# Altium PCB pcdembedded1.PcbDoc
Units mil, origin at the board's own origin, x right, y up, seen from the top; angles counter-clockwise.
Board outline 3915 x 3695 mil, 2 copper layers (Top Layer, Bottom Layer); 28 components, 24 nets, 87 pads, 3 vias.
Unrouted connection lines stored in the file: 3.
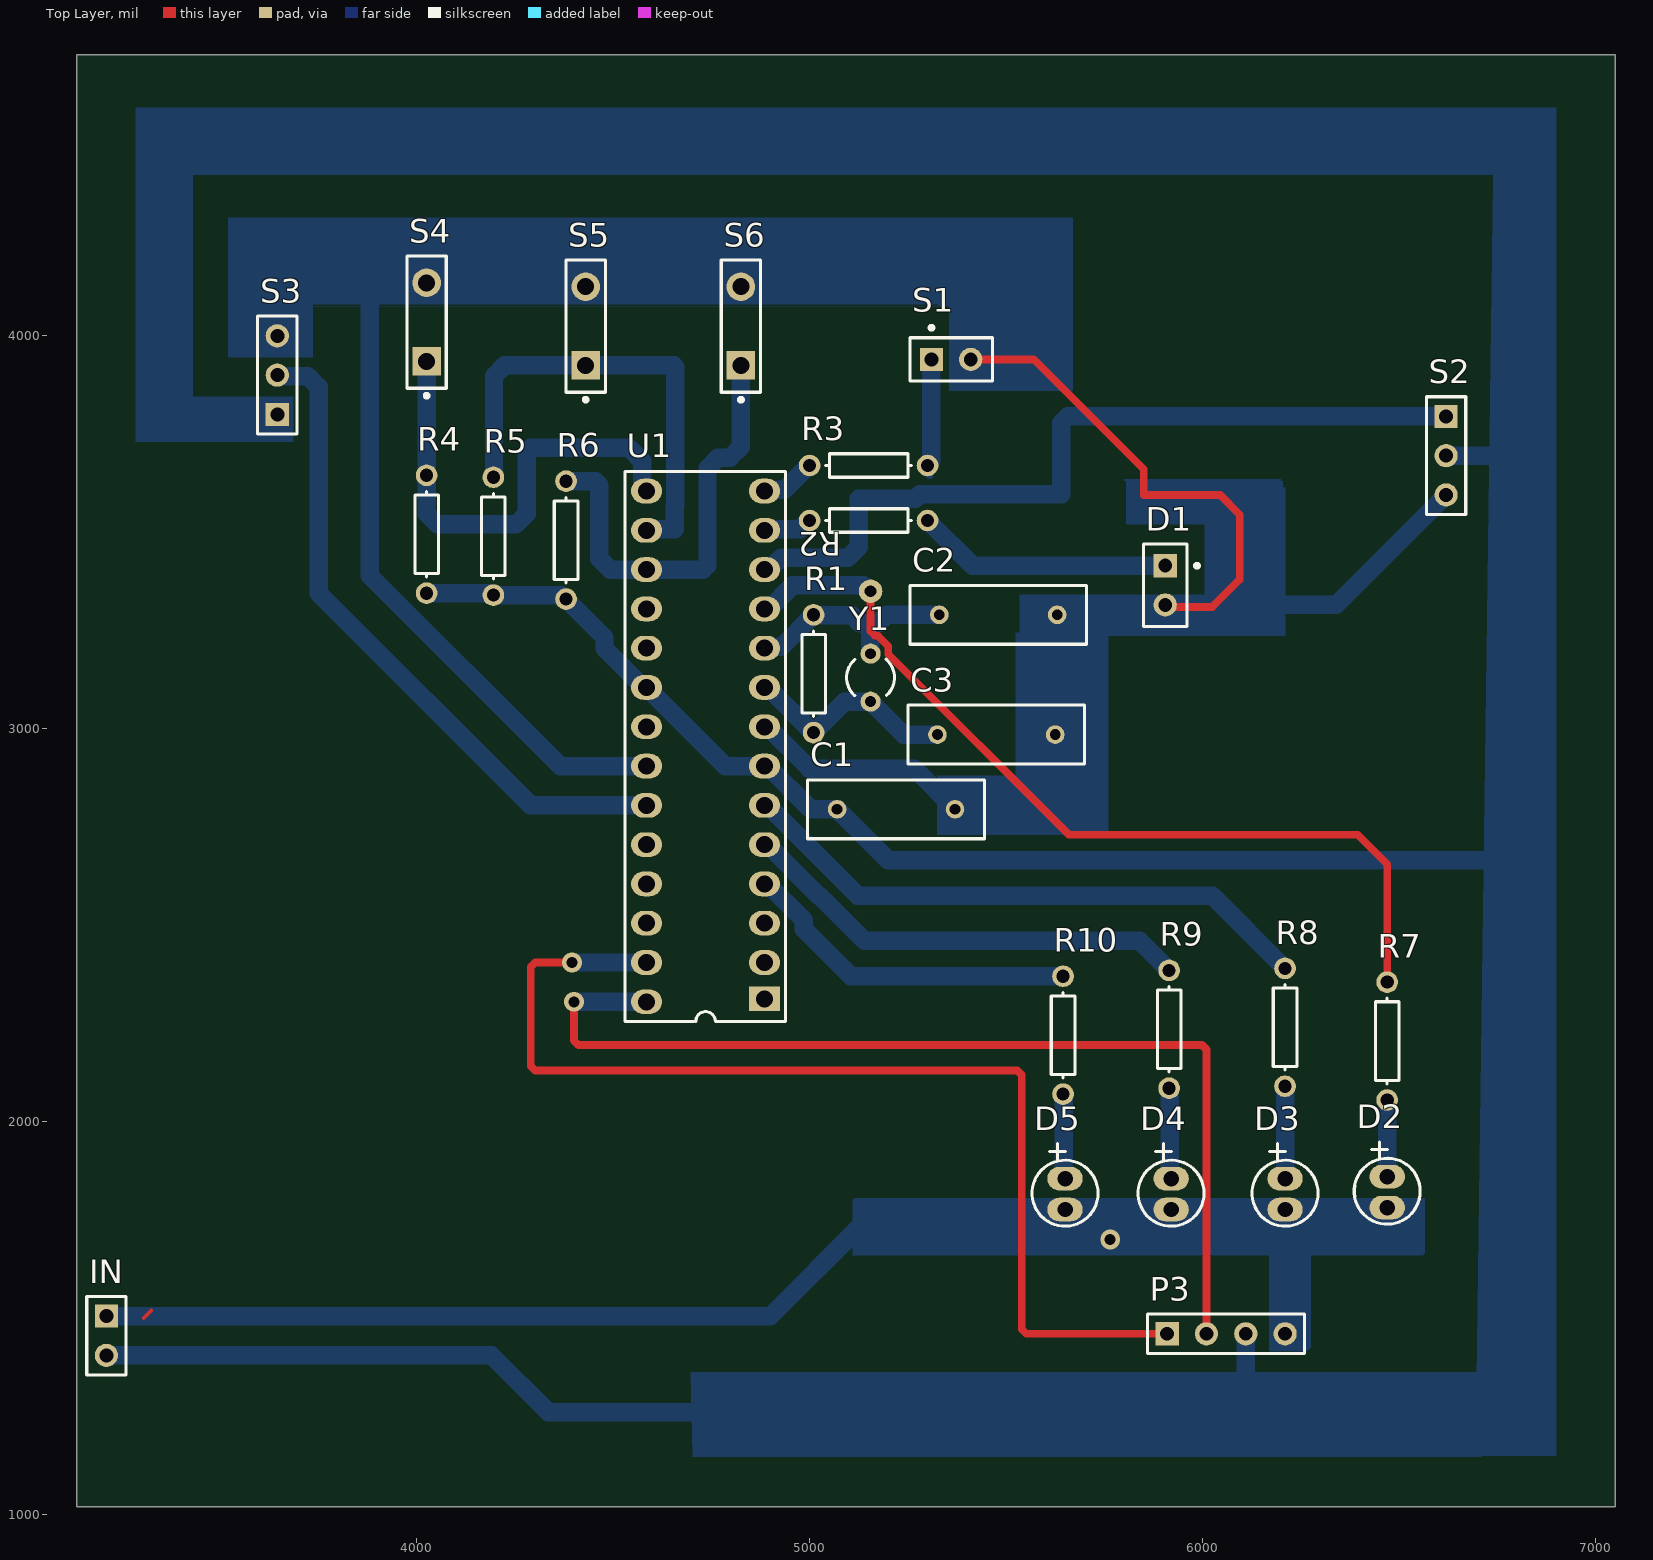
[diagram p0: Top Layer view]
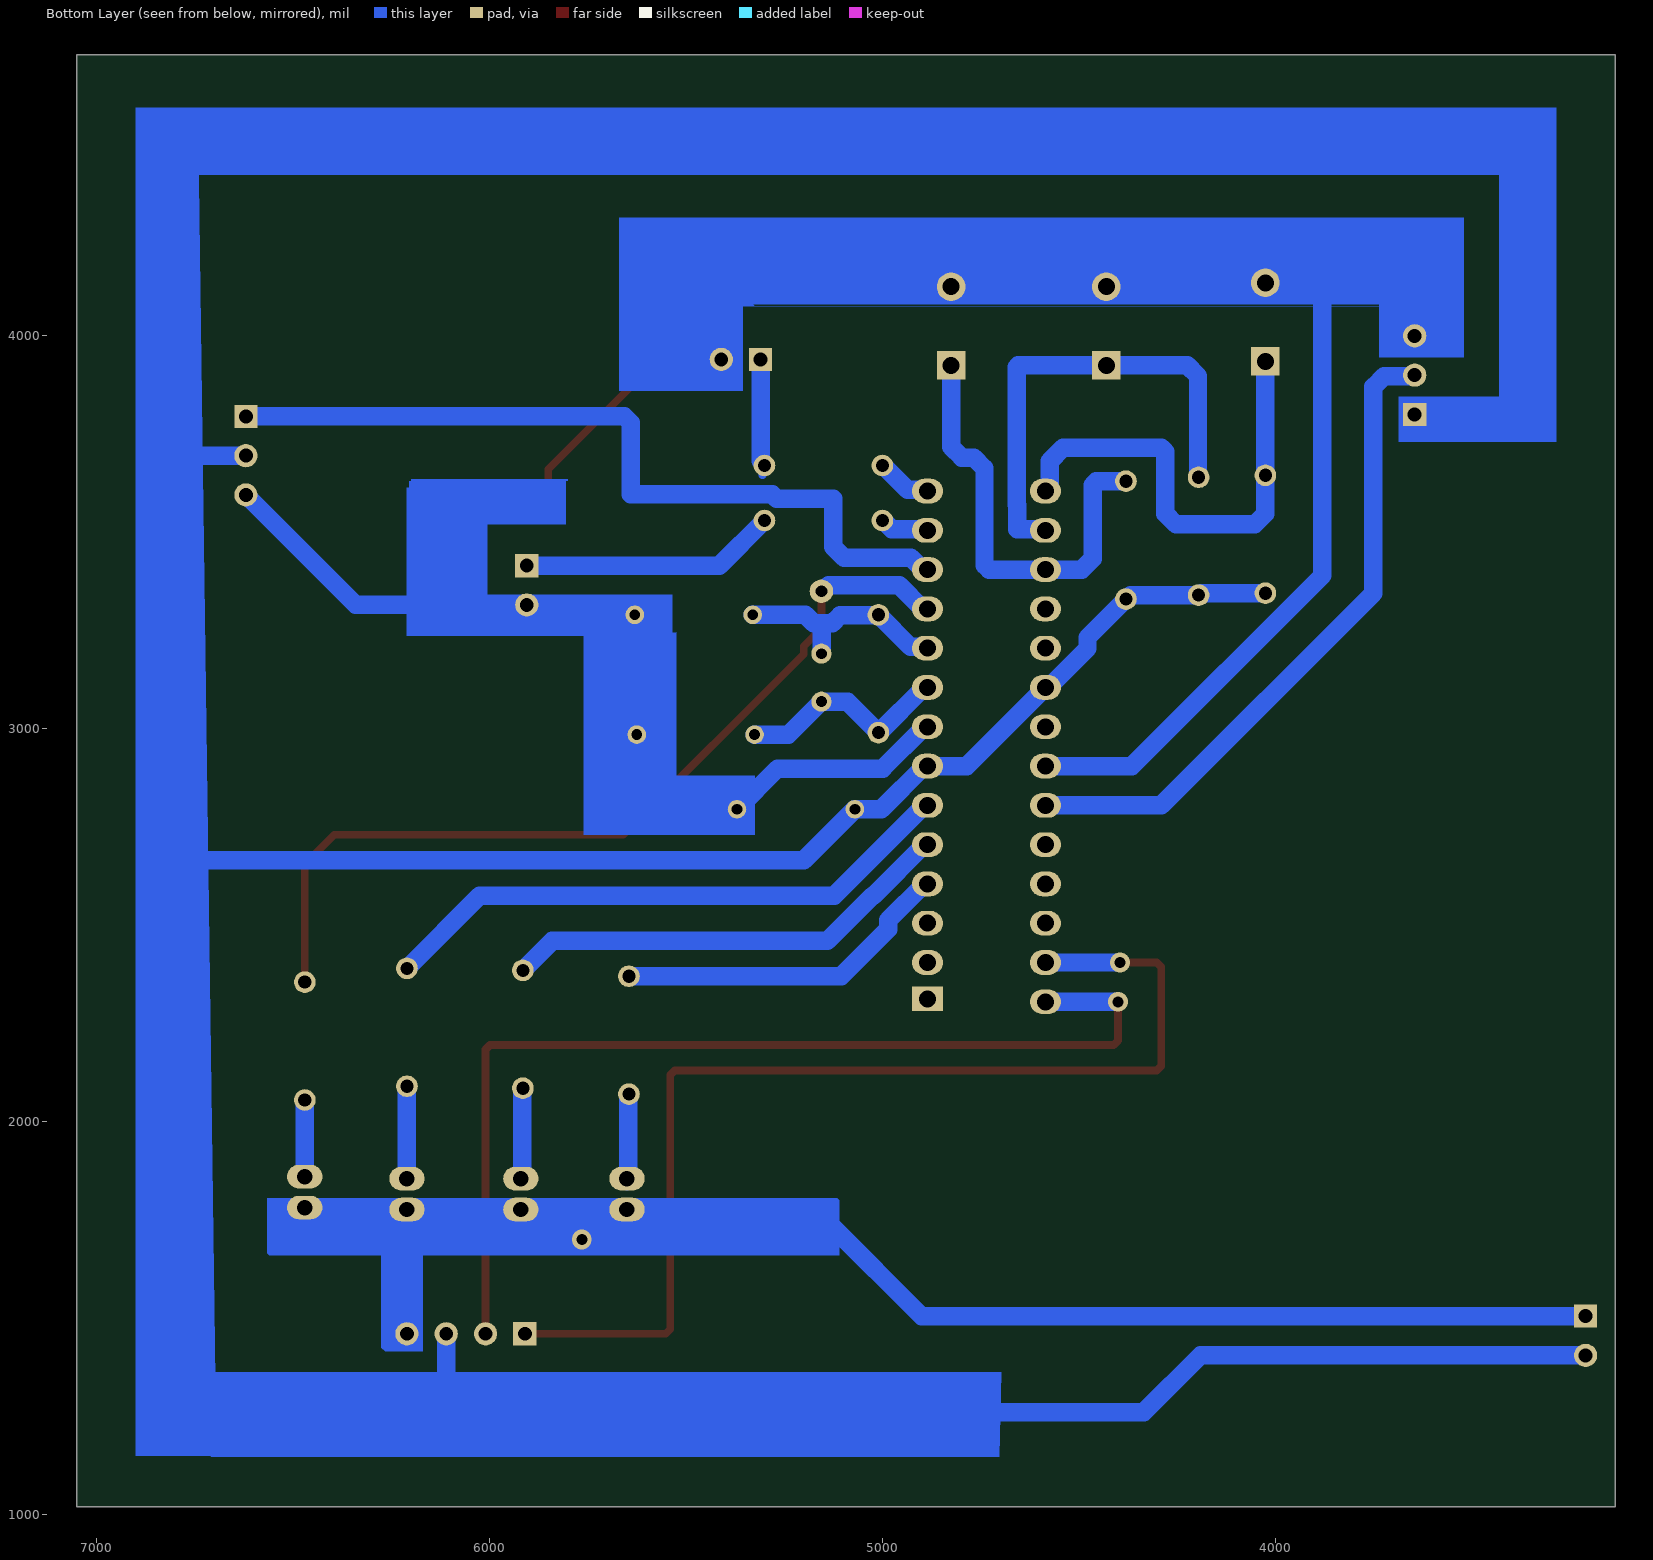
[diagram p1: Bottom Layer view, seen from below]

## Layer stack, top to bottom
Top Solder: solder mask 0.4, Solder Resist, Dk 3.5
Top Layer: signal copper 1.4
Dielectric 1: dielectric 12.6, FR-4, Dk 4.8
Bottom Layer: signal copper 1.4
Bottom Solder: solder mask 0.4, Solder Resist, Dk 3.5

## Board outline
3135,1020 7050,1020 7050,4715 3135,4715

## Design rules (kind name [scope] priority, off if disabled: settings)
Clearance [All] p1: gap=10 ignorepadtopadclearanceinfootprint=FALSE
PolygonConnect [All] p1: connectstyle=Relief reliefconductorwidth=10 reliefentries=4 polygonreliefangle="90 Angle" airgapwidth=10
RoutingVias [All] p1: holewidth=28 width=35 viastyle="Through Hole" minholewidth=28 minwidth=35 maxholewidth=28 maxwidth=35
SolderMaskExpansion [All] p1: expansion=4 istentingtop=FALSE
Width [All] p1: maxlimit=47 minlimit=19.6 preferedwidth=25
30 further rules are at their usual default settings.

## Components (designator, comment, footprint, x,y, rotation, side; value= is the part's Value field where it differs from the comment)
C1 "Cap" RAD-0.3 5220,2795 r180 top value=100pF
C2 "Cap" RAD-0.3 5480,3290 r0 top value=100pF
C3 "Cap" RAD-0.3 5475,2985 r0 top value=100pF
D1 "Bulb" PIN2 5905,3415 r270 top
D2 "LED" CAP10UF 6470,1781.26 r90 top
D3 "LED" CAP10UF 6210,1776.26 r90 top
D4 "LED" CAP10UF 5920,1776.26 r90 top
D5 "LED" CAP10UF 5650,1776.26 r90 top
IN "Header 2" HDR1X2 3210,1505 r270 top
P3 "Header 4" HDR1X4 5910,1460 r0 top
R1 "Res1" AXIAL-0.3 5010,3140 r90 top value=1M
R2 "Res1" AXIAL-0.3 5150,3530 r0 top value=1K
R3 "Res1" AXIAL-0.3 5150,3670 r0 top value=10K
R4 "Res1" AXIAL-0.3 4025,3495 r270 top value=10K
R5 "Res1" AXIAL-0.3 4195,3490 r270 top value=10K
R6 "Res1" AXIAL-0.3 4380,3480 r270 top value=10K
R7 "Res1" AXIAL-0.3 6470,2205 r270 top value=1K
R8 "Res1" AXIAL-0.3 6210,2240 r270 top value=1K
R9 "Res1" AXIAL-0.3 5915,2235 r270 top value=1K
R10 "Res1" AXIAL-0.3 5645,2220 r270 top value=1K
S1 "buzzer" PIN2 5310,3940 r0 top
S2 "servo" HDR1X3 6620,3795 r270 top
S3 "DHT11" HDR1X3 3645,3800 r90 top
S4 "SW-PB" SPST-2 4025,4035 r90 top
S5 "SW-PB" SPST-2 4430,4025 r90 top
S6 "SW-PB" SPST-2 4825,4025 r90 top
U1 "ATMEGA328P-PU" 27_DIP_7.62mm 4885.39,2312.48 r180 top
Y1 "XTAL" R38 5155,3130 r180 top

## Footprints (in the part's own frame and the unit in brackets; to place one, negate y for a bottom-side part, rotate by r counter-clockwise, add the part's x,y. Pads: shape width x height; smd on the part's side, far side on the other; paste and mask are expansions set on the pad)
27_DIP_7.62mm [mm]
  rect 2x1.6 hole 1.1: 1(0,0)
  oval 2x1.6 hole 1.1: 2(0.01,-2.35) 3(0.01,-4.89) 4(0.01,-7.43) 5(0.01,-9.97) 6(0.01,-12.51) 7(0.01,-15.05) 8(0.01,-17.59) 9(0.01,-20.13) 10(0.01,-22.67) 11(0.01,-25.21) 12(0.01,-27.75) 13(0.01,-30.29) 14(0.01,-32.83) 15(7.63,-32.83) 16(7.63,-30.29) 17(7.63,-27.75) 18(7.63,-25.21) 19(7.63,-22.67) 20(7.63,-20.13) 21(7.63,-17.59) 22(7.63,-15.05) 23(7.63,-12.51) 24(7.63,-9.97) 25(7.63,-7.43) 26(7.63,-4.89) 27(7.63,-2.35) 28(7.63,0.19)
  silkscreen extent -1.35,-34.1 9.02,1.46, body extent -0.23,-34.26 7.65,1.68, height 4.65
AXIAL-0.3 [mm] "Axial Device, Thru-Hole; 2 Leads; 0.3 in Pin Spacing"
  round 1.4 hole 0.85: 1(-3.81,0) 2(3.81,0)
  silkscreen extent -2.77,-0.76 2.77,0.76
CAP10UF [mil]
  oval 60x90 hole 39.37 unplated: 1(78.74,0) 2(0,0)
  silkscreen extent -42,-84 167,84
HDR1X2 [mm] "Connector; Header; 2 Position"
  rect 1.5x1.5 hole 0.9: 1(0,0)
  round 1.5 hole 0.9: 2(2.54,0)
  silkscreen extent -1.27,-1.27 3.81,1.27
HDR1X3 [mm] "Connector; Header; 3 Position"
  rect 1.5x1.5 hole 0.9: 1(0,0)
  round 1.5 hole 0.9: 2(2.54,0) 3(5.08,0)
  silkscreen extent -1.27,-1.27 6.35,1.27
HDR1X4 [mm] "Connector; Header; 4 Position"
  rect 1.5x1.5 hole 0.9: 1(0,0)
  round 1.5 hole 0.9: 2(2.54,0) 3(5.08,0) 4(7.62,0)
  silkscreen extent -1.27,-1.27 8.89,1.27
PIN2 [mm] "Photosensitive Diode; 2 Leads"
  rect 1.5x1.5 hole 0.9: 1(0,0)
  round 1.5 hole 0.9: 2(2.54,0)
  silkscreen extent -1.4,-1.4 3.94,2.18
R38 [mm] "Crystal, Thru-Hole; 2 Leads; Body 3.1 x 8.2 mm (Dia.xH)"
  round 1.3 hole 0.7: 1(0,1.55) 2(0,-1.55)
  silkscreen extent -1.55,-1.19 1.55,1.17
RAD-0.3 [mm] "Radial Cap, Thru-Hole; 2 Leads; 0.3 in Pin Spacing"
  round 1.2 hole 0.7: 1(-3.81,0) 2(3.81,0)
  silkscreen extent -5.71,-1.91 5.71,1.91
SPST-2 [mm] "Switch; 2 Leads"
  rect 1.85x1.85 hole 1.1: 1(-2.54,0)
  round 1.85 hole 1.1: 2(2.54,0)
  silkscreen extent -4.89,-1.27 4.28,1.27

## Part data
C1 C2 C3: "Capacitor", LatestRevisionDate=17-Jul-2002, LatestRevisionNote="Re-released for DXP Platform.", PackageDescription="Radial Cap, Thru-Hole; 2 Leads; 0.3 in Pin Spacing", PackageReference=RAD-0.3, Published=8-Jun-2000, Publisher="Altium Limited"
D1: library part Lamp, "Incandescent Bulb", LatestRevisionDate=17-Jul-2002, LatestRevisionNote="Re-released for DXP Platform.", PackageReference=PIN2, Published=24-Mar-1999, Publisher="Altium Limited"
IN: "Header, 2-Pin", LatestRevisionDate=17-Jul-2002, LatestRevisionNote="Re-released for DXP Platform.", Publisher="Altium Limited"
P3: "Header, 4-Pin", LatestRevisionDate=17-Jul-2002, LatestRevisionNote="Re-released for DXP Platform.", Publisher="Altium Limited"
R1 R2 R3 R4 R5 R6 R7 R8 R9 R10: "Resistor", LatestRevisionDate=17-Jul-2002, LatestRevisionNote="Re-released for DXP Platform.", PackageDescription="Axial Device, Thru-Hole; 2 Leads; 0.3 in Pin Spacing", PackageReference=AXIAL-0.3, Published=8-Jun-2000, Publisher="Altium Limited"
S1: library part Speaker, "Loudspeaker", LatestRevisionDate=17-Jul-2002, LatestRevisionNote="Re-released for DXP Platform.", PackageReference=PIN2, Published=24-Mar-1999, Publisher="Altium Limited"
S2 S3: library part "Header 3", "Header, 3-Pin", LatestRevisionDate=17-Jul-2002, LatestRevisionNote="Re-released for DXP Platform.", Publisher="Altium Limited"
S4 S5 S6: "Switch", LatestRevisionDate=17-Jul-2002, LatestRevisionNote="Re-released for DXP Platform.", PackageDescription="Switch; 2 Leads", PackageReference=SPST-2, Published=24-Mar-1999, Publisher="Altium Limited"
U1: "ATMEGA328P-PU; 8 bit Microcontroller AVR 20MHz 1; 32kb Flash; 2kb RAM; I2C SPI 2", Case/Package=PDIP, Frequency=20MHz, Manufacturer="Microchip / Atmel", Max Operating Temperature=85°C, Max Supply Voltage=5.5V, Min Operating Temperature=-40°C, Min Supply Voltage=1.8V, Package Quantity=14, Supplier Part Number 1=ATMEGA328P-PU-ND, Category=Microcontrollers, ComponentLink1Description=https://datasheet.ciiva.com/20168/73-4283-20168380.pdf?src-supplier=Rapid+Electronics, ComponentLink1URL=https://datasheet.ciiva.com/20168/73-4283-20168380.pdf?src-supplier=Rapid+Electronics, ComponentLink2Description=https://datasheet.ciiva.com/19457/2139111-19457070.pdf?src-supplier=Jameco, ComponentLink2URL=https://datasheet.ciiva.com/19457/2139111-19457070.pdf?src-supplier=Jameco, ComponentLink3Description=https://datasheet.ciiva.com/1157/1684409-1157696.pdf?src-supplier=Element14, ComponentLink3URL=https://datasheet.ciiva.com/1157/1684409-1157696.pdf?src-supplier=Element14, ComponentLink4Description=https://datasheet.ciiva.com/26818/atmega328p-pu-26818578.pdf?src-supplier=IIIC, ComponentLink4URL=https://datasheet.ciiva.com/26818/atmega328p-pu-26818578.pdf?src-supplier=IIIC, ComponentLink5Description=https://datasheet.ciiva.com/29119/155197-da-01-en-microcontr-atmega328p-pu-8bit-pdip-28-29119593.pdf?src-supplier=Conrad, ComponentLink5URL=https://datasheet.ciiva.com/29119/155197-da-01-en-microcontr-atmega328p-pu-8bit-pdip-28-29119593.pdf?src-supplier=Conrad, ComponentLink6Description=https://datasheet.ciiva.com/15213/getdatasheetpartid-318533-15213133.pdf?src-supplier=Verical, ComponentLink6URL=https://datasheet.ciiva.com/15213/getdatasheetpartid-318533-15213133.pdf?src-supplier=Verical, Contact Plating=Tin,Matte, Core Architecture=AVR, Data Bus Width=8b, Height=3.28mm, Interface=I2C,SPI,UART,USART,2-Wire, Lead Free="Lead Free", Length=37.4mm, Manufacturer Part Number=ATMEGA328P-PU, Max Frequency=20MHz, Memory Size=32KB, Memory Type=FLASH, Mount="Through Hole", Number of ADC Channels=6, Number of I2C Channels=1, Number of I/Os=23, Number of Pins=28, Number of Programmable I/O=23, Number of PWM Channels=6, Number of SPI Channels=1, Number of Timers/Counters=3, Oscillator Type=Internal, Packaging=Rail/Tube, Peripherals="Brown-out Detect/Reset,POR,PWM,WDT", Pricing 1="1=2,08000, 25=1,91000, 100=1,73000 (USD)", Radiation Hardening=No, RAM Size=2KB, REACH SVHC="No SVHC", RoHS=Yes, Stock 1=5280, Supplier 1=Digi-Key, Watchdog Timer=Yes, Width=6.76mm
Y1: "Crystal Oscillator", LatestRevisionDate=17-Jul-2002, LatestRevisionNote="Re-released for DXP Platform.", PackageDescription="Crystal, Thru-Hole; 2 Leads; Body 3.1 x 8.2 mm (Dia.xH)", PackageReference=R38, Published=8-Jun-2000, Publisher="Altium Limited"

## Free pads (board coordinates)
  round 60 hole 30: 2(5155,3350)

## Via types
v1: diameter 50, hole 28, Top Layer to Bottom Layer, 3 vias

## Nets (pads, with @x,y where several pads share a name; then routed paths per layer and width w, separated by ;. In a path a pad name is that pad's centre, name@x,y a point inside that pad or via, vN(x,y) a via of type N, cw(c..) or ccw(c..) an arc to the next point about the centre after c; other vN are vias at no path point)
+5V: C1.2 IN.2 P3.3 R4.2 R5.2 R6.2 S2.2 S3.1 U1.7 U1.20 | length 5128.6
  Bottom Layer w19.6: 5405,1335 5410,1330 ; 6730,2695 6755,2670
  Bottom Layer w47: IN.2@3204.43,1405 4190,1405 4335,1260 4715.86,1260 ccw(c4715.86,1294.14) 4740,1270 ; R4.2 4187.8,3345 4192.8,3340 R5.2 4367.8,3340 4377.8,3330 R6.2 4477.81,3232.19 4477.81,3204.32 4577.13,3105 U1.20 4588.55,3105 4595.93,3097.61 4595.93,3094.07 4785,2905 U1.7 4892.87,2905 5002.83,2795.05 C1.2 C1.2 5200,2665 6765,2665 6770,2670 ; 6105,1240 6198.03,1333.03 ; 6105,1325 6110,1330 P3.3 ; S2.2 6785,3695 6790,3700
bulb: R2.1 U1.13 | length 125.4
  Bottom Layer w47: U1.13 4888.06,3508.06 4975.86,3508.06 4997.8,3530 R2.1
button1: R4.1 S4.1 U1.15 | length 1217.6
  Bottom Layer w47: S4.1 R4.1 4025,3547.53 4052.53,3520 4252.47,3520 4280,3547.53 4280,3705 4290,3715 4540,3715 4574.07,3680.93 4574.07,3612.39 4581.45,3605 U1.15
button2: R5.1 S5.1 U1.16 | length 1218.6
  Bottom Layer w47: R5.1 4196.55,3641.55 4196.55,3897.47 4224.09,3925 4653.52,3925 4657.87,3920.65 4657.87,3570.64 4656.58,3569.35 4656.58,3508.06 4588.06,3508.06 U1.16
button3: R6.1 S6.1 U1.17 | length 1129
  Bottom Layer w47: R6.1 4455,3630 4465,3620 4465,3432.53 4492.53,3405 U1.17 4728.52,3405 4740,3416.48 4740,3662.47 4767.53,3690 4797.47,3690 4825,3717.53 S6.1
buzzer: R3.1 U1.14 | length 146.9
  Bottom Layer w19.6: R3.1@5000,3655 R3.1@5005,3655
  Bottom Layer w47: U1.14 4888.06,3608.06 4935.86,3608.06 4997.8,3670 R3.1
"data DHT": S3.2 U1.23 | length 1701.2
  Bottom Layer w47: S3.2 3647.31,3897.69 3722.47,3897.69 3750,3870.16 3750,3345 4290,2805 U1.23
GND: C1.1 C2.2 C3.2 D1.2 D2.2 D3.2 D4.2 D5.2 IN.1 P3.4 S1.2 S2.3 S3.3 S4.2 S5.2 S6.2 U1.8 U1.22 | length 6660
  Top Layer w19.6: S1.2 5570,3940 5850,3660 5850,3595 6045,3595 6095,3545 6095,3380 6025,3310 5910,3310 D1.2
  Bottom Layer w19.6: D5.2 D5.2@5666.87,1776.26 ; D1.2 6057.47,3315 6198.73,3315
  Bottom Layer w47: IN.1@3203.97,1505 4900,1505 5130,1735 5135,1735 ; 3880,4165 3880,4160 3890,4150 3880,4140 3880,3390 4365,2905 U1.22 U1.22@4592.87,2905 ; U1.8 4892.87,3005 4999.38,2898.49 5266.51,2898.49 C1.1 ; 6057.47,3315 6070,3327.53 6070,3430 6095,3455 6095,3543.5 ; 6198.73,3315 6340,3315 S2.3
  other v1: 5765,1700
led1: pad.2 R7.1 U1.11 | length 2275.6
  Top Layer w19.6: pad.2 5155,3247.9 5166.48,3236.41 5173.8,3236.41 5200.39,3209.82 5200.39,3189.61 5660,2730 6395,2730 6470,2655 R7.1
  Bottom Layer w47: U1.11 4897.2,3305 4957.2,3365 5136.48,3365 5151.48,3350 pad.2
led2: R8.1 U1.6 | length 1496.9
  Bottom Layer w47: U1.6 4892.87,2805 5122.87,2575 6025,2575 R8.1
led3: R9.1 U1.5 | length 1162.5
  Bottom Layer w47: U1.5 4892.87,2705 5022.87,2575 5025,2575 5049.96,2550.04 5140,2460 5840,2460 R9.1
led4: R10.1 U1.4 | length 870.7
  Bottom Layer w47: U1.4 4892.87,2605 4985,2512.87 4985,2490 5105,2370 R10.1
NetC2_1: C2.1 R1.2 U1.10 Y1.2 | length 575.8
  Bottom Layer w19.6: C2.1@5329.93,3290 C2.1
  Bottom Layer w47: U1.10 4888.06,3208.06 4928.06,3208.06 R1.2 5011.55,3288.45 5107.75,3288.45 5127.61,3268.59 5154.2,3268.59 ; Y1.2 5154.2,3191.82 5154.2,3268.59 ; C2.1@5329.93,3290 5196.2,3290 5174.79,3268.59 5154.2,3268.59
NetC3_1: C3.1 R1.1 U1.9 Y1.1 | length 555.1
  Bottom Layer w47: U1.9 4893.94,3105 5008.94,2990 R1.1 5088.18,3068.18 5154.2,3068.18 Y1.1 5238.93,2985.05 C3.1 C3.1
NetD1_1: D1.1 R2.2 | length 652.6
  Bottom Layer w47: R2.2 5415,3415 D1.1
NetD2_1: D2.1 R7.2 | length 202.1
  Bottom Layer w19.6: R7.2@6465,2050 R7.2
  Bottom Layer w47: D2.1 R7.2
NetD3_1: D3.1 R8.2 | length 235
  Bottom Layer w47: D3.1 R8.2
NetD4_1: D4.1 R9.2 | length 232.1
  Bottom Layer w47: R9.2 5916.55,2083.45 5916.55,1858.45 D4.1
NetD5_1: D5.1 R10.2 | length 220.6
  Bottom Layer w19.6: D5.1@5647.5,1837.5 D5.1@5650,1835
  Bottom Layer w47: R10.2 5646.55,2068.45 5646.55,1858.45 D5.1
NetI2C_6:  | length 27.1
  Top Layer w10: 3305,1500 3324.17,1519.17
NetR3_2: R3.2 S1.1 | length 313.4
  Bottom Layer w19.6: R3.2@5295,3655 R3.2@5300,3660 ; R3.2@5305,3645 R3.2@5305,3677.2
  Bottom Layer w47: R3.2 5300,3672.2 5305,3677.2 5310,3682.2 S1.1
servo: S2.1 U1.12 | length 2074.9
  Bottom Layer w47: U1.12 4897.2,3405 4927.2,3435 5097.47,3435 5125,3462.53 5125,3585 5268.65,3585 5280.13,3596.48 5640,3596.48 5640,3778.52 5656.48,3795 S2.1
"U1 A4": P3.1 U1.27 | length 2833.1
  Top Layer w19.6: v1(4395,2405) 4301.48,2405 4290,2393.52 4290,2141.48 4301.48,2130 5528.52,2130 5540,2118.52 5540,1471.48 5551.48,1460 P3.1
  Bottom Layer w47: v1(4395,2405) U1.27
"U1 A5": P3.2 U1.28 | length 2626.5
  Top Layer w19.6: v1(4400,2305) 4400,2206.48 4411.48,2195 5998.52,2195 6010,2183.52 P3.2
  Bottom Layer w47: v1(4400,2305) U1.28
pads on no net: U1.1 U1.2 U1.3 U1.18 U1.19 U1.21 U1.24 U1.25 U1.26

## Other copper
Bottom Layer:
  rectangle net GND: 5800,3630 6200,3635
  rectangle net GND: 5805,3520 6205,3630
  region net +5V: 3385,3850 3390,3845 3685,3845 3685,3730 3416.3,3730
  region net +5V: 3285,4450 3285,3730 3430,3730 3430,4420 3445,4435
  region net +5V: 6742.31,4580 3285,4580 3285,4410 6810,4410
  region net +5V: 6695,1155 6700,1150 6900,1150 6900,4580 6742.31,4580
  region net GND: 6565,1735 6565,1805 5115,1805 5110,1800 5110,1660 6560,1660 6565,1665
  region net GND: 6170,1690 6170,1415 6265,1415 6275,1425 6275,1675
  region net +5V: 4702.5,1147.5 6707.5,1147.5 6840,1362.5 4697.5,1362.5
  region net GND: 3735,3945 3520,3945 3520,4300 5670,4300 5670,3860 5355,3860 5355,4075 3735,4075 5325,4075 5330,4080 3735,4080
  region net GND: 5325,2880 5325,2730 5520,2730 5545,2730 5530,2730 5530,2880
  region net GND: 5525,3245 5525,2730 5760,2730 5760,3235 5755,3240
  region net GND: 6210,3613.58 6210,3236.42 5545,3236.42 5535,3226.42 5535,3341.42 6005,3341.42 6005,3619.12